# EAGLE board Magnetophon_panel (EAGLE 7.4.0)
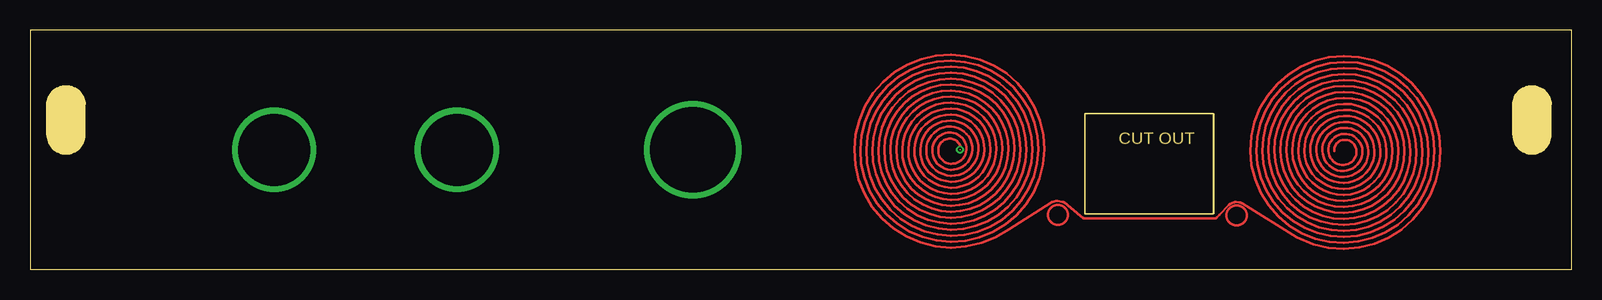
[diagram p0: board, top side]
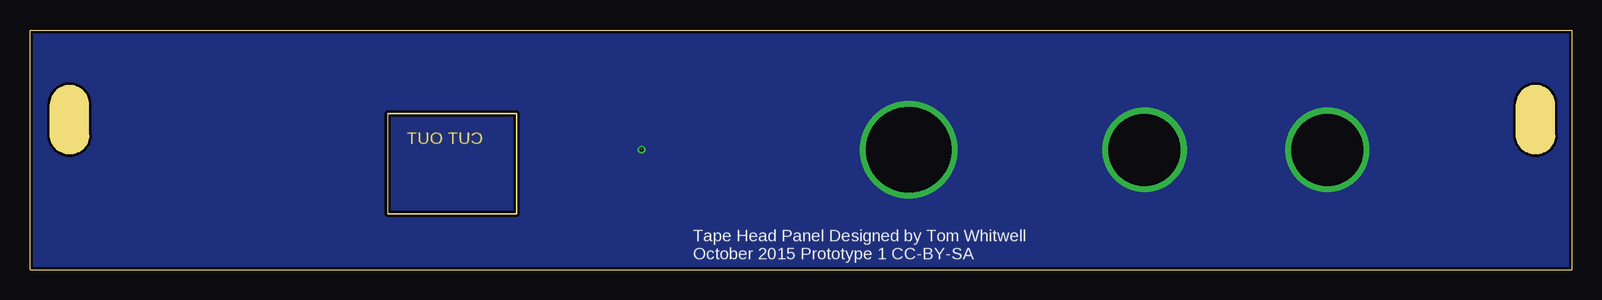
[diagram p1: board, bottom side, seen from below]

Size 128.5 x 20 mm. Coordinates in mm from the lower left corner, seen from the top.
Outline: 128.5,0 128.5,20 0,20 0,0 128.5,0
Outline: 87.94,13.03 98.7,13.03 98.7,4.65 87.94,4.65 87.94,13.03
Copper layers (1*2*15*16): Top 0.035mm / dielectric 0.2mm / Route2 0.0175mm / dielectric 1.1mm / Route15 0.0175mm / dielectric 0.2mm / Bottom 0.035mm
Design rules "SeeedStudio_DRU_no_angle_20130527": minimum track width 6mil, minimum drill 12mil, track to track 6mil, track to pad 6mil, pad to pad 6mil, via to via 6mil, smd to smd 0mil, copper to edge 10mil, drill to drill 10mil, minimum pad ring 6mil, minimum via ring 6mil, stop-mask expansion 2mil, vias tented up to drill 25mil, thermal gap 10mil
Net classes: 0 default: width 0.305 mm; 2 ground: width 0.406 mm; 3 power: width 0.406 mm
Milling: area 87.9,4.6 to 98.7,13

## Placement (x,y rotation side)
U$1  [SLOT_HOLE]  3,12.5 90 top
U$2  [SLOT_HOLE]  125.2,12.5 90 top

## Library data of the parts
U$1 U$2 = MusicThingModular

## Tracks (layer width: path | path; a pad name or v marks a point on that pad's centre or on a via)
GND  (via drill 0.33, 6, 7.1)  (1 unrouted)
  Top 0.2: 77.56,10.01 77.56,10.13 77.54,10.26 77.5,10.39 77.45,10.51 77.37,10.62 77.27,10.72 77.16,10.8 77.04,10.86 76.9,10.91 76.76,10.93 76.61,10.93 76.47,10.91 76.32,10.87 76.19,10.8 76.06,10.71 75.95,10.6 75.86,10.47 75.78,10.32 75.73,10.17 75.71,10.01 75.71,9.84 75.74,9.68 75.79,9.51 75.87,9.36 75.97,9.22 76.1,9.1 76.24,8.99 76.4,8.91 76.58,8.86 76.76,8.83 76.94,8.84 77.13,8.87 77.31,8.93 77.48,9.02 77.63,9.13 77.77,9.27 77.88,9.43 77.97,9.61 78.03,9.81 78.06,10.01 78.06,10.21 78.02,10.42 77.95,10.62 77.85,10.8 77.72,10.97 77.57,11.12 77.39,11.24 77.19,11.34 76.98,11.4 76.76,11.43 76.53,11.43 76.31,11.39 76.09,11.31 75.89,11.2 75.71,11.06 75.55,10.89 75.41,10.69 75.31,10.48 75.24,10.25 75.21,10.01 75.22,9.76 75.26,9.52 75.34,9.29 75.46,9.07 75.62,8.87 75.8,8.69 76.02,8.55 76.25,8.44 76.5,8.37 76.76,8.33 77.02,8.34 77.28,8.39 77.54,8.48 77.77,8.61 77.99,8.78 78.17,8.98 78.33,9.21 78.45,9.46 78.52,9.73 78.56,10.01 78.55,10.29 78.5,10.57 78.4,10.84 78.25,11.1 78.08,11.32 77.86,11.52 77.62,11.69 77.35,11.81 77.06,11.9 76.76,11.93 76.46,11.92 76.16,11.86 75.87,11.76 75.6,11.61 75.35,11.41 75.14,11.18 74.97,10.92 74.83,10.63 74.75,10.33 74.71,10.01 74.72,9.69 74.78,9.37 74.9,9.06 75.06,8.77 75.27,8.51 75.51,8.29 75.79,8.1 76.09,7.96 76.42,7.87 76.76,7.83 77.1,7.85 77.44,7.92 77.76,8.04 78.07,8.21 78.34,8.43 78.58,8.69 78.78,8.98 78.92,9.3 79.02,9.65 79.06,10.01 79.04,10.37 78.97,10.73 78.84,11.07 78.66,11.39 78.43,11.68 78.16,11.93 77.84,12.13 77.5,12.29 77.14,12.39 76.76,12.43 76.38,12.41 76,12.34 75.64,12.2 75.3,12.01 75,11.77 74.74,11.48 74.52,11.15 74.36,10.79 74.25,10.4 74.21,10.01 74.23,9.61 74.31,9.21 74.45,8.83 74.66,8.48 74.91,8.16 75.22,7.88 75.56,7.66 75.94,7.49 76.34,7.38 76.76,7.33 77.18,7.35 77.59,7.44 77.99,7.59 78.36,7.8 78.69,8.07 78.98,8.39 79.22,8.75 79.4,9.15 79.51,9.57 79.56,10.01 79.54,10.45 79.44,10.88 79.29,11.3 79.06,11.68 78.78,12.03 78.45,12.33 78.07,12.58 77.66,12.77 77.21,12.88 76.76,12.93 76.3,12.91 75.85,12.81 75.41,12.65 75.01,12.41 74.65,12.12 74.33,11.77 74.08,11.38 73.88,10.94 73.76,10.48 73.71,10.01 73.73,9.53 73.83,9.06 74.01,8.61 74.25,8.19 74.56,7.81 74.92,7.48 75.33,7.21 75.78,7.01 76.26,6.88 76.76,6.83 77.26,6.86 77.75,6.96 78.22,7.14 78.65,7.4 79.05,7.72 79.39,8.1 79.67,8.53 79.87,9 80.01,9.49 80.06,10.01 80.03,10.53 79.92,11.04 79.73,11.52 79.47,11.98 79.14,12.38 78.74,12.74 78.3,13.03 77.81,13.24 77.29,13.38 76.76,13.43 76.22,13.4 75.69,13.29 75.19,13.09 74.72,12.82 74.29,12.47 73.93,12.06 73.63,11.6 73.41,11.1 73.27,10.56 73.21,10.01 73.24,9.45 73.36,8.9 73.56,8.38 73.85,7.89 74.2,7.45 74.63,7.08 75.11,6.77 75.63,6.54 76.19,6.39 76.76,6.33 77.34,6.37 77.9,6.49 78.44,6.7 78.95,6.99 79.4,7.37 79.79,7.8 80.11,8.3 80.35,8.84 80.5,9.41 80.56,10.01 80.52,10.6 80.4,11.19 80.18,11.75 79.87,12.27 79.49,12.74 79.04,13.14 78.52,13.47 77.96,13.72 77.37,13.87 76.76,13.93 76.14,13.9 75.54,13.76 74.96,13.54 74.42,13.22 73.94,12.83 73.52,12.36 73.18,11.83 72.93,11.25 72.77,10.64 72.71,10.01 72.75,9.37 72.88,8.75 73.12,8.15 73.44,7.6 73.85,7.1 74.33,6.67 74.88,6.32 75.48,6.06 76.11,5.9 76.76,5.83 77.41,5.87 78.06,6.01 78.67,6.25 79.24,6.59 79.75,7.01 80.2,7.51 80.56,8.07 80.83,8.69 80.99,9.34 81.06,10.01 81.02,10.68 80.87,11.34 80.62,11.98 80.28,12.56 79.84,13.09 79.33,13.55 78.75,13.92 78.12,14.19 77.45,14.37 76.76,14.43 76.06,14.39 75.38,14.24 74.73,13.98 74.13,13.63 73.59,13.18 73.12,12.65 72.74,12.06 72.45,11.41 72.28,10.72 72.21,10.01 72.25,9.29 72.41,8.59 72.67,7.92 73.04,7.3 73.5,6.75 74.04,6.27 74.65,5.88 75.32,5.58 76.03,5.4 76.76,5.33 77.49,5.38 78.21,5.54 78.9,5.81 79.54,6.18 80.11,6.66 80.6,7.22 81,7.85 81.3,8.53 81.49,9.26 81.56,10.01 81.51,10.76 81.35,11.5 81.07,12.2 80.68,12.86 80.2,13.45 79.62,13.95 78.98,14.36 78.27,14.67 77.53,14.86 76.76,14.93 75.99,14.88 75.23,14.71 74.51,14.43 73.83,14.03 73.23,13.53 72.71,12.95 72.29,12.28 71.98,11.56 71.78,10.8 71.71,10.01 71.76,9.22 71.93,8.44 72.23,7.7 72.63,7.01 73.14,6.39 73.75,5.86 74.43,5.43 75.17,5.11 75.95,4.91 76.76,4.83 77.57,4.88 78.37,5.06 79.12,5.36 79.83,5.78 80.46,6.3 81.01,6.92 81.45,7.62 81.78,8.38 81.98,9.18 82.06,10.01 82.01,10.84 81.82,11.65 81.51,12.43 81.09,13.15 80.55,13.8 79.92,14.36 79.2,14.81 78.43,15.14 77.61,15.35 76.76,15.43 75.91,15.38 75.08,15.19 74.28,14.88 73.54,14.44 72.88,13.89 72.31,13.24 71.85,12.51 71.5,11.71 71.29,10.87 71.21,10.01 71.27,9.14 71.46,8.29 71.78,7.47 72.23,6.72 72.79,6.04 73.45,5.46 74.2,4.99 75.01,4.63 75.87,4.42 76.76,4.33 77.65,4.39 78.52,4.59 79.35,4.92 80.12,5.38 80.82,5.95 81.41,6.63 81.89,7.39 82.25,8.22 82.47,9.1 82.56,10.01 82.5,10.92 82.3,11.81 81.96,12.66 81.49,13.45 80.9,14.15 80.21,14.76 79.43,15.25 78.58,15.62 77.68,15.85 76.76,15.93 75.83,15.87 74.92,15.67 74.05,15.32 73.25,14.84 72.53,14.24 71.91,13.53 71.4,12.74 71.03,11.87 70.8,10.95 70.71,10.01 70.77,9.06 70.98,8.13 71.33,7.24 71.82,6.42 72.44,5.68 73.16,5.05 73.97,4.54 74.86,4.16 75.8,3.92 76.76,3.83 77.73,3.9 78.67,4.11 79.58,4.47 80.42,4.97 81.17,5.6 81.81,6.33 82.34,7.17 82.73,8.07 82.97,9.02 83.06,10.01 82.99,10.99 82.77,11.96 82.41,12.88 81.9,13.74 81.26,14.51 80.51,15.16 79.66,15.7 78.74,16.09 77.76,16.34 76.76,16.43 75.75,16.37 74.77,16.14 73.83,15.77 72.95,15.25 72.17,14.6 71.5,13.83 70.96,12.96 70.55,12.02 70.3,11.03 70.21,10.01 70.28,8.98 70.51,7.98 70.89,7.02 71.42,6.13 72.08,5.33 72.86,4.65 73.75,4.09 74.7,3.68 75.72,3.43 76.76,3.33 77.81,3.4 78.83,3.63 79.81,4.03 80.71,4.57 81.52,5.24 82.22,6.04 82.78,6.94 83.2,7.91 83.46,8.95 83.56,10.01 83.49,11.07 83.25,12.12 82.85,13.11 82.3,14.03 81.61,14.86 80.8,15.57 79.89,16.14 78.89,16.57 77.84,16.84 76.76,16.93 75.67,16.86 74.61,16.62 73.6,16.21 72.66,15.65 71.82,14.95 71.1,14.12 70.51,13.19 70.08,12.18 69.81,11.11 69.71,10.01 69.78,8.9 70.03,7.82 70.44,6.79 71.02,5.83 71.73,4.98 72.57,4.24 73.52,3.65 74.55,3.21 75.64,2.93 76.76,2.83 77.88,2.91 78.98,3.16 80.03,3.58 81,4.16 81.88,4.89 82.62,5.75 83.23,6.71 83.68,7.76 83.96,8.87 84.06,10.01 83.98,11.15 83.72,12.27 83.3,13.34 82.7,14.33 81.97,15.21 81.09,15.97 80.11,16.59 79.05,17.05 77.92,17.33 76.76,17.43 75.59,17.35 74.46,17.09 73.37,16.66 72.36,16.05 71.46,15.3 70.69,14.42 70.06,13.42 69.6,12.33 69.31,11.19 69.21,10.01 69.29,8.82 69.56,7.67 70,6.56 70.61,5.54 71.38,4.62 72.28,3.84 73.29,3.2 74.39,2.73 75.56,2.44 76.76,2.33 77.96,2.42 79.14,2.68 80.26,3.14 81.3,3.76 82.23,4.54 83.03,5.45 83.67,6.48 84.15,7.61 84.45,8.79 84.56,10.01 84.47,11.23 84.2,12.43 83.74,13.57 83.11,14.62 82.32,15.57 81.39,16.38 80.34,17.04 79.2,17.52 78,17.82 76.76,17.93 75.52,17.85 74.3,17.57 73.14,17.1 72.07,16.46 71.11,15.66 70.29,14.71 69.62,13.64 69.13,12.49 68.82,11.27 68.71,10.01 68.8,8.75 69.08,7.51 69.55,6.34 70.21,5.25 71.02,4.27 71.98,3.43 73.06,2.76 74.24,2.26 75.48,1.95 76.76,1.83 78.04,1.92 79.29,2.21 80.49,2.69 81.59,3.35
  other vias: 55.24,10 20.35,10 35.59,10 77.52,10.01
  pour Bottom: -0.05,20.02 128.57,20.02 128.52,-0.05 0,-0.05
N$2
  Top 0.2: 108.72,9.91 108.72,10.03 108.74,10.16 108.78,10.29 108.84,10.41 108.92,10.52 109.01,10.61 109.12,10.7 109.25,10.76 109.38,10.81 109.53,10.83 109.67,10.83 109.82,10.81 109.96,10.76 110.1,10.7 110.22,10.6 110.33,10.49 110.43,10.37 110.5,10.22 110.55,10.07 110.58,9.91 110.57,9.74 110.55,9.57 110.49,9.41 110.42,9.26 110.31,9.12 110.19,9 110.04,8.89 109.88,8.81 109.71,8.76 109.53,8.73 109.34,8.73 109.15,8.77 108.97,8.83 108.81,8.91 108.65,9.03 108.51,9.17 108.4,9.33 108.31,9.51 108.25,9.71 108.22,9.91 108.23,10.11 108.27,10.31 108.33,10.51 108.43,10.7 108.56,10.87 108.72,11.02 108.89,11.14 109.09,11.24 109.3,11.3 109.53,11.33 109.75,11.33 109.97,11.29 110.19,11.21 110.39,11.1 110.58,10.96 110.74,10.79 110.87,10.59 110.97,10.38 111.04,10.15 111.08,9.91 111.07,9.66 111.02,9.42 110.94,9.19 110.82,8.97 110.67,8.77 110.48,8.59 110.27,8.45 110.03,8.34 109.78,8.26 109.53,8.23 109.26,8.24 109,8.29 108.75,8.38 108.51,8.51 108.3,8.68 108.11,8.88 107.95,9.11 107.84,9.36 107.76,9.63 107.72,9.91 107.73,10.19 107.79,10.47 107.89,10.74 108.03,10.99 108.21,11.22 108.42,11.42 108.67,11.59 108.94,11.71 109.23,11.79 109.53,11.83 109.83,11.82 110.13,11.76 110.42,11.65 110.69,11.5 110.93,11.31 111.14,11.08 111.32,10.82 111.45,10.53 111.54,10.22 111.58,9.91 111.56,9.58 111.5,9.27 111.39,8.96 111.22,8.67 111.02,8.41 110.77,8.19 110.5,8 110.19,7.86 109.86,7.77 109.53,7.73 109.18,7.75 108.84,7.81 108.52,7.93 108.22,8.11 107.94,8.32 107.7,8.58 107.51,8.88 107.36,9.2 107.27,9.55 107.22,9.91 107.24,10.27 107.31,10.62 107.44,10.97 107.62,11.29 107.85,11.58 108.13,11.83 108.44,12.03 108.78,12.19 109.15,12.29 109.53,12.33 109.91,12.31 110.28,12.24 110.64,12.1 110.98,11.91 111.28,11.66 111.55,11.38 111.76,11.05 111.93,10.69 112.03,10.3 112.08,9.91 112.06,9.51 111.97,9.11 111.83,8.73 111.63,8.38 111.37,8.06 111.07,7.78 110.72,7.56 110.34,7.39 109.94,7.28 109.53,7.23 109.1,7.25 108.69,7.34 108.29,7.49 107.92,7.7 107.59,7.97 107.3,8.29 107.06,8.65 106.89,9.05 106.77,9.47 106.72,9.91 106.75,10.35 106.84,10.78 107,11.19 107.22,11.58 107.5,11.93 107.83,12.23 108.21,12.48 108.63,12.66 109.07,12.78 109.53,12.83 109.98,12.81 110.44,12.71 110.87,12.55 111.27,12.31 111.64,12.02 111.95,11.67 112.21,11.27 112.4,10.84 112.53,10.38 112.58,9.91 112.55,9.43 112.45,8.96 112.28,8.5 112.03,8.08 111.73,7.71 111.36,7.38 110.95,7.11 110.5,6.91 110.02,6.78 109.53,6.73 109.03,6.76 108.54,6.86 108.07,7.04 107.63,7.3 107.24,7.62 106.89,8 106.62,8.43 106.41,8.89 106.28,9.39 106.22,9.91 106.25,10.42 106.36,10.93 106.55,11.42 106.81,11.88 107.15,12.28 107.54,12.64 107.99,12.92 108.47,13.14 108.99,13.28 109.53,13.33 110.06,13.3 110.59,13.19 111.1,12.99 111.57,12.72 111.99,12.37 112.36,11.96 112.65,11.5 112.88,10.99 113.02,10.46 113.08,9.91 113.04,9.35 112.92,8.8 112.72,8.28 112.44,7.79 112.08,7.35 111.66,6.97 111.18,6.67 110.65,6.43 110.1,6.29 109.53,6.23 108.95,6.26 108.38,6.39 107.84,6.6 107.33,6.89 106.88,7.26 106.49,7.7 106.17,8.2 105.94,8.74 105.78,9.31 105.72,9.91 105.76,10.5 105.89,11.09 106.11,11.65 106.41,12.17 106.79,12.64 107.25,13.04 107.76,13.37 108.32,13.62 108.91,13.77 109.53,13.83 110.14,13.79 110.75,13.66 111.32,13.44 111.86,13.12 112.34,12.73 112.76,12.26 113.1,11.73 113.35,11.15 113.51,10.54 113.58,9.91 113.54,9.27 113.4,8.65 113.17,8.05 112.84,7.5 112.43,7 111.95,6.57 111.4,6.22 110.81,5.96 110.18,5.79 109.53,5.73 108.87,5.77 108.23,5.91 107.61,6.15 107.04,6.49 106.53,6.91 106.09,7.41 105.73,7.97 105.46,8.59 105.29,9.23 105.22,9.91 105.27,10.58 105.41,11.24 105.66,11.88 106.01,12.46 106.44,12.99 106.95,13.45 107.53,13.81 108.17,14.09 108.83,14.26 109.53,14.33 110.22,14.29 110.9,14.14 111.55,13.88 112.16,13.53 112.7,13.08 113.17,12.55 113.55,11.96 113.83,11.3 114.01,10.62 114.08,9.91 114.03,9.19 113.88,8.49 113.61,7.82 113.25,7.2 112.79,6.64 112.24,6.16 111.63,5.77 110.96,5.48 110.25,5.3 109.53,5.23 108.79,5.28 108.07,5.44 107.39,5.71 106.75,6.08 106.17,6.56 105.68,7.11 105.28,7.74 104.98,8.43 104.8,9.16 104.72,9.91 104.77,10.66 104.94,11.4 105.22,12.1 105.6,12.76 106.09,13.34 106.66,13.85 107.31,14.26 108.01,14.57 108.76,14.76 109.53,14.83 110.3,14.78 111.05,14.61 111.78,14.33 112.45,13.93 113.05,13.43 113.57,12.85 113.99,12.18 114.3,11.46 114.5,10.69 114.58,9.91 114.53,9.11 114.35,8.34 114.06,7.6 113.65,6.91 113.14,6.29 112.54,5.76 111.86,5.33 111.12,5.01 110.33,4.81 109.53,4.73 108.71,4.78 107.92,4.96 107.16,5.26 106.45,5.68 105.82,6.2 105.28,6.82 104.84,7.52 104.51,8.28 104.3,9.08 104.22,9.91 104.28,10.74 104.46,11.55 104.77,12.33 105.2,13.05 105.73,13.7 106.36,14.26 107.08,14.71 107.86,15.04 108.68,15.25 109.53,15.33 110.38,15.28 111.21,15.09 112,14.77 112.74,14.34 113.41,13.79 113.97,13.14 114.44,12.41 114.78,11.61 114.99,10.77 115.08,9.91 115.02,9.04 114.83,8.18 114.5,7.37 114.06,6.61 113.49,5.94 112.83,5.36 112.08,4.88 111.27,4.53 110.41,4.31 109.53,4.23 108.64,4.29 107.76,4.49 106.93,4.82 106.16,5.27 105.47,5.85 104.87,6.53 104.39,7.29 104.03,8.12 103.81,9 103.72,9.91 103.78,10.81 103.98,11.71 104.32,12.56 104.79,13.35 105.38,14.05 106.07,14.66 106.85,15.15 107.7,15.52 108.6,15.75 109.53,15.83 110.45,15.77 111.36,15.56 112.23,15.22 113.04,14.74 113.76,14.14 114.38,13.43 114.88,12.64 115.25,11.77 115.49,10.85 115.58,9.91 115.51,8.96 115.3,8.03 114.95,7.14 114.46,6.32 113.85,5.58 113.12,4.95 112.31,4.44 111.42,4.06 110.49,3.82 109.53,3.73 108.56,3.79 107.61,4.01 106.7,4.37 105.87,4.87 105.11,5.5 104.47,6.23 103.94,7.06 103.56,7.97 103.31,8.92 103.22,9.91 103.29,10.89 103.51,11.86 103.88,12.78 104.39,13.64 105.03,14.4 105.78,15.06 106.62,15.6 107.55,15.99 108.52,16.24 109.53,16.33 110.53,16.26 111.52,16.04 112.46,15.66 113.33,15.14 114.11,14.49 114.78,13.73 115.33,12.86 115.73,11.92 115.98,10.93 116.08,9.91 116.01,8.88 115.78,7.87 115.39,6.92 114.86,6.03 114.2,5.23 113.42,4.55 112.54,3.99 111.58,3.58 110.57,3.33 109.53,3.23 108.48,3.3 107.45,3.53 106.48,3.92 105.57,4.46 104.76,5.14 104.06,5.94 103.5,6.84 103.08,7.81 102.82,8.84 102.72,9.91 102.8,10.97 103.03,12.02 103.43,13.01 103.98,13.93 104.67,14.76 105.48,15.47 106.4,16.04 107.39,16.47 108.44,16.73 109.53,16.83 110.61,16.76 111.67,16.52 112.69,16.11 113.62,15.55 114.47,14.85 115.19,14.02 115.77,13.09 116.21,12.08 116.48,11.01 116.58,9.91 116.5,8.8 116.25,7.72 115.84,6.69 115.27,5.73 114.55,4.88 113.71,4.14 112.77,3.55 111.73,3.11 110.64,2.83 109.53,2.73 108.4,2.81 107.3,3.06 106.25,3.48 105.28,4.06 104.41,4.79 103.66,5.64 103.05,6.61 102.61,7.66 102.33,8.77 102.22,9.91 102.3,11.05 102.56,12.17 102.99,13.24 103.58,14.23 104.32,15.11 105.19,15.87 106.17,16.49 107.24,16.94 108.36,17.23 109.53,17.33 110.69,17.25 111.83,16.99 112.91,16.55 113.92,15.95 114.82,15.2 115.59,14.31 116.22,13.32 116.68,12.23 116.97,11.09 117.08,9.91 116.99,8.72 116.73,7.57 116.28,6.46 115.67,5.44 114.91,4.52 114.01,3.74 112.99,3.1 111.89,2.63 110.72,2.34 109.53,2.23 108.32,2.31 107.14,2.58 106.02,3.03 104.98,3.66 104.05,4.43 103.25,5.35 102.61,6.38 102.13,7.5 101.83,8.69 101.72,9.91 101.81,11.13 102.08,12.32 102.54,13.46 103.17,14.52 103.97,15.47 104.9,16.28 105.94,16.93 107.08,17.42 108.29,17.72 109.53,17.83 110.77,17.75 111.98,17.47 113.14,17 114.21,16.36 115.17,15.55 116,14.61 116.66,13.54 117.16,12.39 117.46,11.16 117.58,9.91 117.49,8.64 117.2,7.41 116.73,6.23 116.08,5.14 115.26,4.17 114.3,3.33 113.22,2.65 112.04,2.15 110.8,1.84 109.53,1.73 108.24,1.82 106.99,2.11 105.62,2.69
N$3
  Top 0.2: 81.58,3.35 85.14,5.6 arc-18 85.26,5.66 85.53,5.72 arc-24 85.67,5.73 86.08,5.65 arc-29 86.22,5.59 87.58,4.47 87.77,4.31 arc39 87.91,4.27 98.76,4.27 arc45 98.92,4.33 99.16,4.57 99.93,5.39 arc-23 100.03,5.46 100.35,5.6 arc-30 100.52,5.63 100.81,5.6 arc-26 101.05,5.52 105.61,2.69
(copper drawn outside any net)
  shapes: Top circle x2

## Text on the board
Dimension: CUT OUT
bPlace: Tape Head Panel Designed by Tom Whitwell / October 2015 Prototype 1 CC-BY-SA